# Altium PCB Sampler_DIOT.PCBDOC (part 6 of 9)
Units mm, origin at the board's own origin, x right, y up, seen from the top; angles counter-clockwise.
Board outline 222.17 x 100 mm, 4 copper layers (Top, GP1(GND), L3, Bot), stack 1.672 mm thick; 664 components, 411 nets, 2128 pads, 911 vias.
Unrouted connection lines stored in the file: 4.
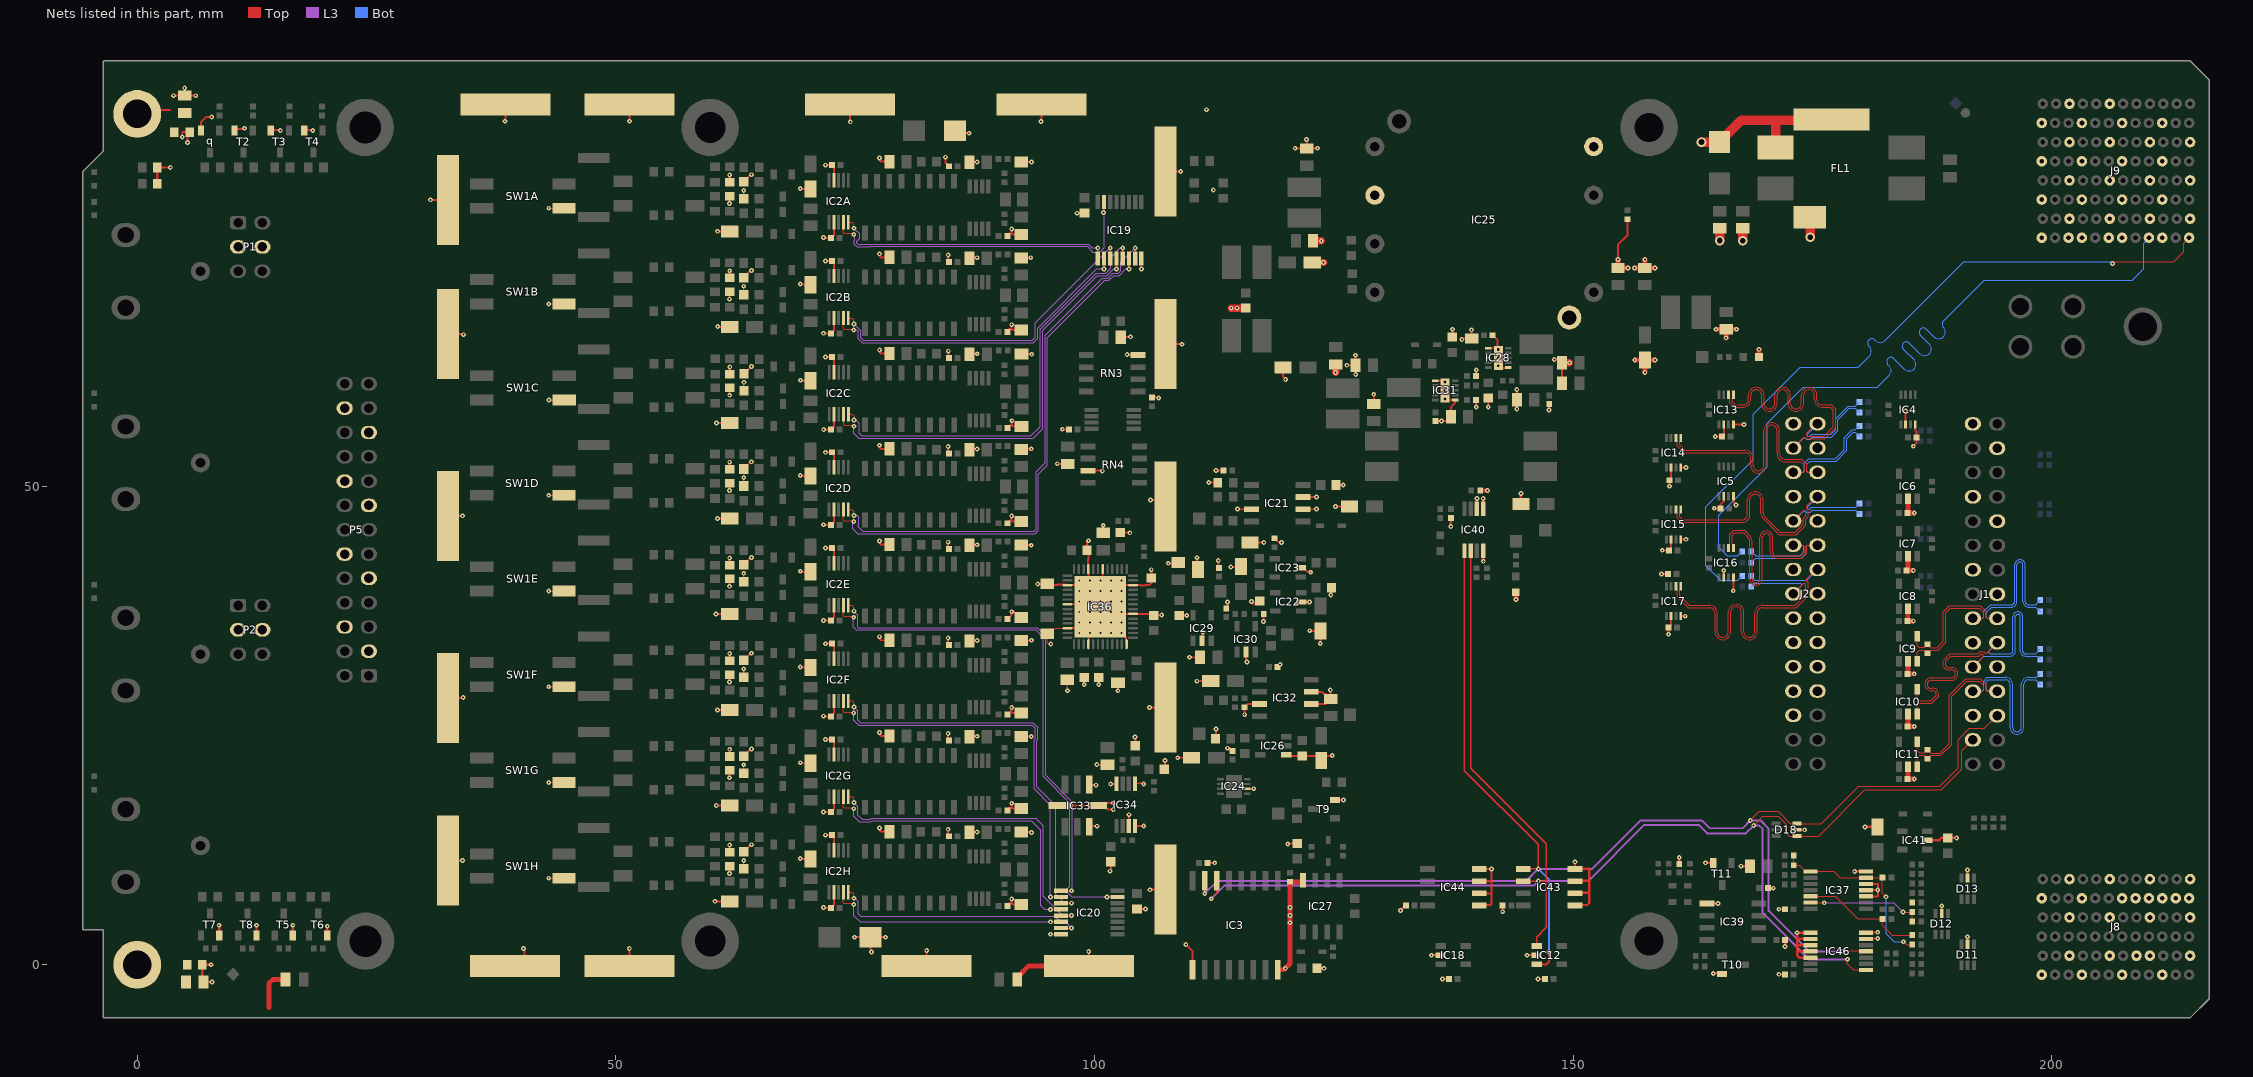
[diagram p6: the nets of this part, all layers, seen from the top]

## Via types
v1: diameter 0.5, hole 0.2, Top to Bot, tented both sides, 878 vias
v2: diameter 1, hole 0.6, Top to Bot, tented both sides, 18 vias
v3: diameter 0.6, hole 0.3, Top to Bot, tented both sides, 13 vias
v4: diameter 1.27, hole 0.711, Top to Bot, tented both sides, 2 vias

## Nets (pads, with @x,y where several pads share a name; then routed paths per layer and width w, separated by ;. In a path a pad name is that pad's centre, name@x,y a point inside that pad or via, vN(x,y) a via of type N, cw(c..) or ccw(c..) an arc to the next point about the centre after c; other vN are vias at no path point) (continued)
BP_IO.LVDS_P11: J9.D1 R133.1 | length 79.4
  Bot w0.127: R133.1@167.674,43.2 167.203,42.729 166.113,42.729 165.202,43.641 165.202,46.959 170.282,52.039 170.282,56.582 174.046,60.346 181.805,60.346 182.905,61.445 183.039,61.58 ccw(c182.545,62.074) 183.039,62.568 182.903,62.704 cw(c183.217,63.019) 182.903,63.333 cw(c183.217,63.019) 183.532,63.333 ; 183.532,63.332 184.621,62.243 ccw(c185.116,62.737) 185.61,62.243 ccw(c185.116,62.737) 185.647,63.19 185.647,63.193 184.519,64.321 cw(c184.834,64.635) 184.519,64.949 cw(c184.834,64.635) 185.148,64.949 ; 185.149,64.949 186.238,63.86 ccw(c186.732,64.353) 187.226,63.859 ccw(c186.732,64.353) 187.263,64.807 187.263,64.81 186.909,65.164 186.29,65.783 cw(c186.605,66.097) 186.29,66.411 cw(c186.605,66.097) 186.919,66.411 187.709,65.621 ccw(c188.203,66.115) 188.697,65.621 ccw(c188.203,66.115) 188.703,66.603 188.697,66.609 cw(c189.011,66.923) 188.697,67.238 192.96,71.501 193.155,71.501 208.411,71.501 209.606,72.696 209.606,75.387 J9.D1@210.169,75.95
BP_IO.LVDS_P12: J9.A1 R134.1 | length 77.8
  Top w0.127: v1(206.375,73.264) 206.568,73.457 212.771,73.457 213.792,74.478 213.792,75.373 J9.A1@214.369,75.95
  Bot w0.127: R134.1@167.674,40.6 167.231,40.157 165.41,40.157 163.875,41.693 163.875,47.838 168.808,52.771 168.808,57.533 173.721,62.446 179.805,62.446 180.823,63.463 180.957,63.598 ccw(c180.463,64.092) 180.957,64.586 180.899,64.644 cw(c181.213,64.959) 180.899,65.273 cw(c181.213,64.959) 181.528,65.273 181.586,65.215 ccw(c182.08,65.708) 182.574,65.215 190.155,72.795 190.816,73.457 206.182,73.457 v1(206.375,73.264)
BP_IO.LVDS_P13: J9.J1
BP_IO.LVDS_P14: J9.G1
BP_IO.LVDS_P15: J8.E2
BP_MGT_Rx_N: J8.E5
BP_MGT_Rx_P: J8.D5
BP_MGT_Tx_N: J8.B5
BP_MGT_Tx_P: J8.A5
CH0_A0: IC2A.4 IC19.15 | length 35.2
  Top w0.127: IC2A.4@73.775,77.567 73.775,76.458 73.825,76.408 74.754,76.408 v1(74.85,76.312) ; IC19.15@100.927,79.62 IC19.15@101.004,79.697 101.004,78.657 v1(100.944,78.597)
  L3 w0.127: v1(74.85,76.312) 74.934,76.397 74.934,75.73 74.919,75.715 74.919,75.302 75.211,75.01 76.573,75.01 76.608,75.045 99.229,75.045 99.844,74.43 100.377,74.43 100.405,74.459 100.536,74.459 101.004,74.926 101.004,78.657 v1(100.944,78.597)
CH0_A1: IC2A.5 IC19.1 | length 29.5
  Top w0.127: IC2A.5@74.275,77.567 74.688,77.567 74.875,77.379 v1(74.875,76.947) ; IC19.1@100.354,73.797 v1(100.354,74.899)
  L3 w0.127: v1(74.875,76.947) 75.469,76.354 75.469,75.905 75.173,75.609 75.173,75.407 75.316,75.264 76.468,75.264 76.503,75.299 99.334,75.299 99.734,74.899 v1(100.354,74.899)
CH1_A0: IC2B.4 IC19.2 | length 34.3
  Top w0.127: IC2B.4@73.775,67.567 73.775,66.458 73.825,66.408 74.754,66.408 v1(74.85,66.312) ; v1(101.004,72.695) IC19.2@101.004,73.797
  L3 w0.127: v1(74.85,66.312) 74.934,66.397 75.043,66.397 75.315,66.125 75.315,65.425 75.739,65.001 93.599,65.001 94.073,65.475 94.073,66.518 100.25,72.695 v1(101.004,72.695)
CH1_A1: IC2B.5 IC19.3 | length 35
  Top w0.127: IC2B.5@74.275,67.567 74.688,67.567 74.875,67.379 v1(74.875,66.947) ; IC19.3@101.654,73.797 v1(101.654,74.899)
  L3 w0.127: v1(74.875,66.947) 75.569,66.254 75.569,65.53 75.844,65.255 93.494,65.255 93.819,65.58 93.819,67.065 v1(101.654,74.899)
CH2_A0: IC2C.4 IC19.4 | length 45.3
  Top w0.127: IC2C.4@73.788,57.523 73.788,56.414 73.838,56.364 74.767,56.364 v1(74.863,56.269) ; v1(102.304,72.695) IC19.4@102.304,73.797
  L3 w0.127: v1@74.947,56.353 v1(74.863,56.269) 74.863,55.536 75.398,55.001 93.59,55.001 94.581,55.992 94.581,66.308 100.274,72.001 101.291,72.001 102.006,72.716 102.283,72.716 102.304,72.737 v1(102.304,72.695)
CH2_A1: IC2C.5 IC19.5 | length 46.3
  Top w0.127: IC2C.5@74.288,57.523 74.7,57.523 74.888,57.335 v1(74.888,56.904) ; IC19.5@102.954,73.797 v1(102.954,74.899)
  L3 w0.127: v1(74.888,56.904) 75.095,56.904 75.419,56.58 75.419,55.53 75.694,55.255 93.369,55.255 94.327,56.213 94.327,66.413 100.169,72.255 101.186,72.255 101.694,72.763 101.694,73.88 102.713,74.899 v1(102.954,74.899)
CH3_A0: IC2D.4 IC19.6 | length 56
  Top w0.127: IC2D.4@73.775,47.567 73.775,46.458 73.825,46.408 74.754,46.408 v1(74.85,46.312) ; v1(103.604,72.695) IC19.6@103.604,73.797
  L3 w0.127: v1@74.934,46.397 v1(74.85,46.312) 74.769,46.231 74.769,45.53 75.248,45.051 93.823,45.051 94.152,45.38 94.152,51.263 95.089,52.2 95.089,65.525 101.057,71.493 101.502,71.493 102.01,72.001 102.591,72.001 103.286,72.695 v1(103.604,72.695)
CH3_A1: IC2D.5 IC19.7 | length 57
  Top w0.127: IC2D.5@74.275,47.567 74.688,47.567 74.875,47.379 v1(74.875,46.947) ; IC19.7@104.254,73.797 v1(104.254,74.899)
  L3 w0.127: v1(74.875,46.947) 75.177,46.947 75.369,46.755 75.369,46.03 75.344,46.005 75.344,45.755 75.794,45.305 93.718,45.305 93.898,45.485 93.898,51.513 94.835,52.45 94.835,65.746 100.836,71.747 101.396,71.747 101.904,72.255 102.486,72.255 102.744,72.513 102.744,73.39 v1(104.254,74.899)
CH4_A0: IC2E.4 IC20.15 | length 57.1
  Top w0.127: IC2E.4@73.775,37.567 73.775,36.458 73.825,36.408 74.754,36.408 v1(74.85,36.312) ; v1(101.297,7.087) IC20.15@102.399,7.087
  L3 w0.127: v1@74.934,36.397 v1(74.85,36.312) 74.794,36.256 74.794,35.305 75.119,34.98 93.844,34.98 94.669,34.155 94.669,31.637 94.65,31.618 94.65,19.674 97.444,16.88 97.444,9.348 97.436,9.34 97.436,8.195 97.16,7.919 97.16,7.554 97.628,7.087 v1(101.297,7.087)
CH4_A1: IC2E.5 IC20.1 | length 51.9
  Top w0.127: IC2E.5@74.275,37.567 74.688,37.567 74.875,37.379 v1(74.875,36.947) ; IC20.1@96.499,7.737 v1(97.601,7.737)
  L3 w0.127: v1(74.875,36.947) 75.291,36.532 75.291,35.249 75.305,35.234 94.015,35.234 94.923,34.326 94.923,31.532 94.904,31.512 94.904,19.78 97.698,16.985 97.698,9.243 97.69,9.235 97.69,7.826 v1(97.601,7.737)
CH5_A0: IC2F.4 IC20.2 | length 42
  Top w0.127: IC2F.4@73.775,27.567 73.775,26.458 73.825,26.408 74.754,26.408 v1(74.85,26.312) ; v1(95.397,7.087) IC20.2@96.499,7.087
  L3 w0.127: v1@74.934,26.397 v1(74.85,26.312) 74.85,25.524 75.369,25.005 93.519,25.005 93.835,24.69 93.835,23.673 93.694,23.532 93.694,18.38 95.397,16.677 v1(95.397,7.087)
CH5_A1: IC2F.5 IC20.3 | length 43.3
  Top w0.127: IC2F.5@74.275,27.567 74.688,27.567 74.875,27.379 v1(74.875,26.947) ; IC20.3@96.499,6.437 v1(97.601,6.437)
  L3 w0.127: v1(74.875,26.947) 75.291,26.532 75.291,26.13 75.244,26.083 75.244,25.605 75.544,25.305 93.578,25.305 94.089,24.795 94.089,23.567 93.948,23.427 93.948,18.626 95.944,16.63 95.944,7.38 96.887,6.437 v1(97.601,6.437)
CH6_A0: IC2G.4 IC20.4 | length 33.6
  Top w0.127: IC2G.4@73.775,17.567 73.775,16.458 73.825,16.408 74.754,16.408 v1(74.85,16.312) ; v1(95.397,5.787) IC20.4@96.499,5.787
  L3 w0.127: v1@74.934,16.397 v1(74.85,16.312) 74.85,15.499 75.419,14.93 76.649,14.93 76.79,15.071 93.403,15.071 94.394,14.08 94.394,6.183 94.791,5.787 v1(95.397,5.787)
CH6_A1: IC2G.5 IC20.5 | length 34.8
  Top w0.127: IC2G.5@74.275,17.567 74.688,17.567 74.875,17.379 v1(74.875,16.947) ; IC20.5@96.499,5.137 v1(97.601,5.137)
  L3 w0.127: v1(74.875,16.947) 75.291,16.532 75.291,15.634 75.719,15.205 76.565,15.205 76.685,15.325 93.849,15.325 94.66,14.514 94.66,7.146 96.67,5.137 v1(97.601,5.137)
CH7_A0: IC2H.4 IC20.6 | length 25.4
  Top w0.127: IC2H.4@73.775,7.567 73.775,6.458 73.825,6.408 74.754,6.408 v1(74.85,6.312) ; v1(95.397,4.487) IC20.6@96.499,4.487
  L3 w0.127: v1@74.934,6.397 v1(74.85,6.312) 74.85,5.149 75.512,4.487 v1(95.397,4.487)
CH7_A1: IC2H.5 IC20.7 | length 27
  Top w0.127: IC2H.5@74.275,7.567 74.688,7.567 74.875,7.379 v1(74.875,6.947) ; IC20.7@96.499,3.837 v1(97.601,3.837)
  L3 w0.127: v1(74.875,6.947) 74.952,6.947 75.319,6.58 75.319,5.33 75.574,5.075 95.862,5.075 96.557,4.38 97.057,4.38 v1(97.601,3.837)
CHASSIS1: C36.1 M4.1 R47.2 R49.1 | length 4.5
  Top w0.152: C36.1@5.1,-1.8 C36.1@5.2,-1.7
  Top w0.508: 13.75,-4.462 13.75,-1.95 14.15,-1.55 R49.1@15.48,-1.55
CHASSIS2: C34.1 M3.1 R46.2 | length 3.4
  Top w0.203: M3.1@0,89.292 3.407,89.292
EEM0_I2C.SCL: D18.1 IC3.14 IC12.1 IC40.2 IC43.6 IC46.1 J1.27 | length 163.5
  Top w0.127: v1(112.2,6.9) 112.789,7.489 IC3.14@112.789,8.78 ; v1(168.875,14.55) 169.845,15.52 171.455,15.52 172.3,14.675 172.3,13.75 172.6,13.45 D18.1@173.4,13.45 175.654,13.45 180.479,18.275 188.45,18.275 190.625,20.45 190.625,22.343 J1.27@191.772,23.49 ; v1(178.675,0.575) 178.675,0.103 179.285,-0.508 IC46.1@180.631,-0.508
  Top w0.152: IC40.2@139.305,43.25 139.305,20.556 147.201,12.66 147.201,8.75 ; IC43.6@144.8,8.735 144.815,8.75 v1(146.371,8.75) 147.201,8.75 ; IC12.1@146.2,1.95 146.2,2.9 147.201,3.901 147.201,8.75
  L3 w0.203: v1(112.2,6.9) 113.606,8.306 145.927,8.306 v1(146.371,8.75) 151.575,8.75 157.441,14.616 163.116,14.616 164.007,13.725 168.05,13.725 v1(168.875,14.55) 169.445,14.55 169.796,14.199 169.796,5.431 174.653,0.575 v1(178.675,0.575)
EEM0_I2C.SDA: D18.3 IC3.15 IC12.3 IC40.1 IC43.5 IC46.4 J1.26 | length 167.5
  Top w0.127: v1(111.519,7.45) IC3.15@111.519,8.78 ; v1(168.525,15.075) 169.475,16.025 171.425,16.025 172.7,14.75 D18.3@173.4,14.75 175.938,14.75 179.838,18.65 188.3,18.65 190.225,20.575 190.225,23.525 191.4,24.7 192.982,24.7 J1.26@194.312,26.03 ; v1(178.159,1.4) 178.201,1.442 IC46.4@180.631,1.442
  Top w0.152: IC40.1@138.655,43.25 138.655,20.293 146.371,12.577 v1@146.371,10.055 ; IC43.5@145.03,10.055 v1@146.185,10.055 ; v1@146.22,10.02 v1@146.185,10.055 ; v1(146.371,10.02) v1@146.371,10.055 ; v1@146.185,10.055 v1@146.371,10.055
  Top w0.203: IC12.3@146.2,0.05 147.225,0.05 147.5,0.325 v1(147.5,1.35)
  L3 w0.203: v1(111.519,7.45) 112.804,8.735 145.086,8.735 v1(146.371,10.02) 151.995,10.02 157.055,15.08 163.47,15.08 164.288,14.262 167.712,14.262 v1(168.525,15.075) 169.597,15.075 170.444,14.228 170.444,5.636 174.68,1.4 v1(178.159,1.4)
  Bot w0.203: v1(146.371,10.02) 147.5,8.891 v1(147.5,1.35)
EEM_IO.LVDS_N5: IC9.4 J1.18 R18.1 R143.2 | length 30.7
  Top w0.127: IC9.4@185.95,34.3 185.95,33.324 186.122,33.152 186.732,33.152 R18.1@187.05,33.47 187.391,33.129 188.045,33.129 188.696,33.78 188.696,36.896 189.325,37.525 192.559,37.525 193.154,36.93 193.154,36.321 193.285,36.19 J1.18@194.312,36.19
  Bot w0.127: J1.18@194.312,36.19 193.319,36.19 193.185,36.325 193.185,36.821 193.739,37.375 193.863,37.375 195.815,37.375 ccw(c195.815,37.942) 196.383,37.942 196.383,41.778 cw(c196.696,41.778) 196.696,42.092 cw(c196.696,41.778) 197.01,41.778 197.01,37.942 ccw(c197.577,37.942) 197.577,37.375 198.31,37.375 198.355,37.375 R143.2@198.83,36.9
EEM_IO.LVDS_N6: IC10.3 J1.21 R144.2 | length 33.2
  Top w0.127: IC10.3@185.95,26.2 185.95,27.148 186.148,27.346 187.496,27.346 187.642,27.492 188.2,28.05 188.2,28.223 ccw(c187.533,28.223) 187.533,28.89 187.413,28.89 cw(c187.413,29.304) 186.999,29.304 cw(c187.413,29.304) 187.413,29.717 189.54,29.717 ccw(c189.54,30.385) 190.208,30.385 ccw(c189.54,30.385) 189.54,31.052 189.285,31.052 cw(c189.285,31.466) 188.993,31.758 189.455,32.221 190.397,32.221 192.389,32.221 192.589,32.421 192.75,32.421 192.864,32.307 192.864,32.202 J1.21@191.772,31.11
  Bot w0.127: J1.21@191.772,31.11 192.918,32.256 193.935,32.256 195.688,32.256 ccw(c195.688,32.774) 196.205,32.774 196.205,36.351 cw(c196.469,36.351) 196.469,36.614 cw(c196.469,36.351) 196.732,36.351 196.732,32.774 ccw(c197.25,32.774) 197.25,32.256 198.312,32.256 198.474,32.256 R144.2@198.83,31.9
EEM_IO.LVDS_N7: IC11.4 J1.24 R19.1 R145.2 | length 35
  Top w0.127: IC11.4@185.95,23.3 185.95,22.377 186.194,22.134 186.714,22.134 R19.1@187.05,22.47 187.395,22.125 188.318,22.125 189.296,23.103 189.296,28.155 191.016,29.875 192.55,29.875 193.154,29.271 193.154,28.701 193.285,28.57 J1.24@194.312,28.57
  Bot w0.127: J1.24@194.312,28.57 193.388,28.57 193.195,28.763 193.195,29.586 193.38,29.771 193.827,29.771 195.198,29.771 cw(c195.198,29.308) 195.662,29.308 195.662,24.806 ccw(c196.379,24.806) 196.379,24.089 ccw(c196.379,24.806) 197.097,24.806 197.097,29.308 cw(c197.56,29.308) 197.56,29.771 198.351,29.771 198.359,29.771 R145.2@198.83,29.3
EEM_IO.LVDS_N8: IC13.5 J2.3 R146.2 | length 37.9
  Top w0.127: IC13.5@166.75,59.55 166.75,59.275 166.627,59.152 166.627,58.829 166.953,58.503 167.564,58.503 167.755,58.503 ccw(c167.755,59.067) 168.318,59.067 168.318,59.499 cw(c169.136,59.499) 169.136,60.317 cw(c169.136,59.499) 169.953,59.499 169.953,58.647 ccw(c170.517,58.647) 170.517,58.084 ccw(c170.517,58.647) 171.08,58.647 171.08,59.499 cw(c171.898,59.499) 171.898,60.317 cw(c171.898,59.499) 172.715,59.499 172.715,58.647 ccw(c173.279,58.647) 173.279,58.084 ccw(c173.279,58.647) 173.842,58.647 173.842,59.499 cw(c174.66,59.499) 174.66,60.317 cw(c174.66,59.499) 175.477,59.499 175.477,59.067 ccw(c176.041,59.067) 176.041,58.503 176.978,58.503 177.168,58.314 177.422,58.06 177.422,56.109 176.287,54.975 174.383,54.975 174.235,55.123 174.129,55.123 J2.3@173.002,53.996
  Bot w0.127: J2.3@173.002,53.996 174.081,55.075 174.25,55.075 174.4,54.925 174.8,54.925 174.993,55.118 176.977,55.118 177.676,55.817 177.676,56.967 178.834,58.125 179.505,58.125 R146.2@179.93,57.7
EEM_IO.LVDS_N9: IC14.5 J2.6 R147.2 | length 35.3
  Top w0.127: IC14.5@161.25,55.05 161.25,54.775 161.127,54.652 161.127,54.311 161.687,53.75 166.417,53.75 167.989,53.75 cw(c167.989,52.933) 168.806,52.933 168.806,52.186 ccw(c169.37,52.186) 169.37,51.622 ccw(c169.37,52.186) 169.933,52.186 169.933,55.819 cw(c170.751,55.819) 170.751,56.637 cw(c170.751,55.819) 171.568,55.819 171.568,53.389 ccw(c172.132,53.389) 172.132,52.825 173.125,52.825 173.9,52.825 174.399,52.326 174.399,51.53 174.473,51.456 J2.6@175.542,51.456
  Bot w0.127: J2.6@175.542,51.456 174.549,51.456 174.425,51.58 174.425,52.275 174.771,52.621 177.499,52.621 178.515,53.637 178.59,53.712 178.59,54.94 179.271,55.621 179.509,55.621 R147.2@179.93,55.2
EEM_IO.LVDS_N10: IC15.5 J2.9 R148.2 | length 30.4
  Top w0.127: IC15.5@161.25,47.55 161.25,47.275 161.127,47.152 161.127,46.828 161.48,46.475 167.473,46.475 167.663,46.475 ccw(c167.663,47.039) 168.227,47.039 168.227,48.594 cw(c169.044,48.594) 169.044,49.412 cw(c169.044,48.594) 169.862,48.594 169.862,47.207 ccw(c170.425,47.207) 170.027,46.808 171.663,45.172 171.689,45.172 173.207,45.172 174.042,46.007 174.042,46.645 174.309,46.912 174.309,47.429 174.235,47.503 174.129,47.503 J2.9@173.002,46.376
  Bot w0.127: J2.9@173.002,46.376 174.081,47.455 174.25,47.455 174.4,47.305 174.8,47.305 174.993,47.498 179.532,47.498 R148.2@179.93,47.1
EEM_IO.LVDS_N11: IC16.5 J2.12 R149.2 | length 31.4
  Top w0.127: IC16.5@166.75,43.55 166.75,43.825 166.627,43.948 166.627,44.863 166.762,44.998 166.889,45.125 167.815,45.125 168.326,44.615 cw(c168.034,44.323) 168.447,44.323 168.447,40.316 ccw(c169.114,40.316) 169.114,39.649 ccw(c169.115,40.316) 169.782,40.316 169.782,44.661 cw(c170.195,44.661) 170.195,45.074 cw(c170.195,44.661) 170.609,44.661 170.609,43.143 ccw(c171.276,43.143) 171.276,42.476 172.631,42.476 173.892,42.476 174.399,42.983 174.399,43.761 174.473,43.836 J2.12@175.542,43.836
  Bot w0.127: R149.2@168.614,42 169.085,42.471 170.076,42.471 ; 170.076,42.47 173.845,42.47 174.383,43.008 174.383,43.705 174.514,43.836 J2.12@175.542,43.836
EEM_IO.LVDS_N12: IC17.5 J2.15 R150.2 | length 36.1
  Top w0.127: IC17.5@161.25,39.55 161.25,39.275 161.127,39.152 161.127,38.567 162.141,37.554 162.7,37.554 164.271,37.554 cw(c164.271,36.737) 165.089,36.737 165.089,34.784 ccw(c165.652,34.784) 165.652,34.22 ccw(c165.652,34.784) 166.216,34.784 166.216,36.827 cw(c167.033,36.827) 167.033,37.644 cw(c167.033,36.827) 167.851,36.827 167.851,34.784 ccw(c168.414,34.784) 168.414,34.22 ccw(c168.414,34.784) 168.978,34.784 168.978,36.737 cw(c169.795,36.737) 169.795,37.554 171.888,37.554 173.209,37.554 174.042,38.387 174.042,39.025 174.309,39.292 174.309,39.809 174.235,39.883 174.129,39.883 J2.15@173.002,38.756
  Bot w0.127: R150.2@168.614,39.452 169.041,39.879 169.047,39.873 173.815,39.873 173.904,39.784 173.904,39.658 J2.15@173.002,38.756
EEM_IO.LVDS_N13: J2.18
EEM_IO.LVDS_N14: J2.21
EEM_IO.LVDS_N15: J2.24
EEM_IO.LVDS_P5: IC9.3 J1.17 R18.2 R127.2 | length 30.6
  Top w0.127: IC9.3@185.95,31.7 185.95,32.644 186.154,32.848 186.732,32.848 R18.2@187.05,32.53 187.395,32.875 188.15,32.875 188.95,33.675 188.95,36.791 189.43,37.271 192.454,37.271 192.9,36.825 192.9,36.325 192.765,36.19 J1.17@191.772,36.19
  Bot w0.127: J1.17@191.772,36.19 192.8,36.19 192.931,36.321 192.931,36.926 193.633,37.629 193.863,37.629 195.815,37.629 ccw(c195.815,37.942) 196.129,37.942 196.129,41.778 cw(c196.696,41.778) 196.696,42.346 cw(c196.696,41.778) 197.264,41.778 197.264,37.942 ccw(c197.577,37.942) 197.577,37.629 198.31,37.629 198.359,37.629 R127.2@198.83,38.1
EEM_IO.LVDS_P6: IC10.4 J1.20 R128.2 | length 32.9
  Top w0.127: IC10.4@185.95,28.8 185.95,27.852 186.202,27.6 186.682,27.6 187.391,27.6 187.946,28.155 187.946,28.223 ccw(c187.533,28.223) 187.533,28.636 187.413,28.636 cw(c187.413,29.304) 186.745,29.304 cw(c187.413,29.304) 187.413,29.971 189.54,29.971 ccw(c189.54,30.385) 189.954,30.385 ccw(c189.54,30.385) 189.54,30.798 189.285,30.798 cw(c189.285,31.466) 188.813,31.938 189.144,32.269 189.35,32.475 192.268,32.475 192.514,32.721 192.914,32.721 193.064,32.571 193.233,32.571 J1.20@194.312,33.65
  Bot w0.127: J1.20@194.312,33.65 193.391,32.729 193.611,32.51 193.935,32.51 195.688,32.51 ccw(c195.688,32.774) 195.951,32.774 195.951,36.351 cw(c196.469,36.351) 196.469,36.868 cw(c196.469,36.351) 196.986,36.351 196.986,32.774 ccw(c197.25,32.774) 197.25,32.51 198.312,32.51 198.34,32.51 R128.2@198.83,33
EEM_IO.LVDS_P7: IC11.3 J1.23 R19.2 R129.2 | length 34.9
  Top w0.127: IC11.3@185.95,20.7 185.95,21.623 186.207,21.88 186.7,21.88 R19.2@187.05,21.53 187.391,21.871 188.424,21.871 189.55,22.997 189.55,28.05 191.121,29.621 192.445,29.621 192.9,29.166 192.9,28.705 192.765,28.57 192.3,28.57 J1.23@191.772,28.57
  Bot w0.127: J1.23@191.772,28.57 192.697,28.57 192.89,28.763 192.89,29.64 193.275,30.025 193.827,30.025 195.198,30.025 cw(c195.198,29.308) 195.916,29.308 195.916,24.806 ccw(c196.379,24.806) 196.379,24.343 ccw(c196.379,24.806) 196.843,24.806 196.843,29.308 cw(c197.56,29.308) 197.56,30.025 198.351,30.025 198.455,30.025 R129.2@198.83,30.4
EEM_IO.LVDS_P8: IC13.6 J2.2 R130.2 | length 37
  Top w0.127: IC13.6@166.25,59.55 166.25,59.275 166.373,59.152 166.373,58.723 166.847,58.249 167.564,58.249 167.755,58.249 ccw(c167.755,59.067) 168.572,59.067 168.572,59.499 cw(c169.136,59.499) 169.136,60.063 cw(c169.136,59.499) 169.699,59.499 169.699,58.647 ccw(c170.517,58.647) 170.517,57.83 ccw(c170.517,58.647) 171.334,58.647 171.334,59.499 cw(c171.898,59.499) 171.898,60.063 cw(c171.898,59.499) 172.461,59.499 172.461,58.647 ccw(c173.279,58.647) 173.279,57.83 ccw(c173.279,58.647) 174.096,58.647 174.096,59.499 cw(c174.66,59.499) 174.66,60.063 cw(c174.66,59.499) 175.223,59.499 175.223,59.067 ccw(c176.041,59.067) 176.041,58.249 176.873,58.249 177.168,57.954 177.168,57.766 177.168,56.214 176.182,55.229 174.489,55.229 174.414,55.303 174.414,55.558 175.392,56.536 J2.2@175.542,56.536
  Bot w0.127: J2.2@175.542,56.536 174.45,55.444 174.45,55.339 174.564,55.225 174.725,55.225 174.923,55.423 176.923,55.423 177.422,55.922 177.422,57.072 178.729,58.379 179.509,58.379 R130.2@179.93,58.8
EEM_IO.LVDS_P9: IC14.6 J2.5 R131.2 | length 35.8
  Top w0.127: IC14.6@160.75,55.05 160.75,54.775 160.873,54.652 160.873,54.205 161.582,53.496 166.417,53.496 167.989,53.496 cw(c167.989,52.933) 168.552,52.933 168.552,52.186 ccw(c169.37,52.186) 169.37,51.368 ccw(c169.37,52.186) 170.187,52.186 170.187,55.819 cw(c170.751,55.819) 170.751,56.383 cw(c170.751,55.819) 171.314,55.819 171.314,53.389 ccw(c172.132,53.389) 172.132,52.571 173.125,52.571 173.794,52.571 174.145,52.221 174.145,51.53 174.07,51.456 J2.5@173.002,51.456
  Bot w0.127: J2.5@173.002,51.456 174.03,51.456 174.171,51.597 174.171,52.396 174.65,52.875 177.394,52.875 178.336,53.817 178.336,55.045 179.166,55.875 179.505,55.875 R131.2@179.93,56.3
EEM_IO.LVDS_P10: IC15.6 J2.8 R132.2 | length 31.2
  Top w0.127: IC15.6@160.75,47.55 160.75,47.275 160.873,47.152 160.873,46.723 161.375,46.221 167.473,46.221 167.663,46.221 ccw(c167.663,47.039) 168.481,47.039 168.481,48.594 cw(c169.044,48.594) 169.044,49.158 cw(c169.044,48.594) 169.608,48.594 169.608,47.207 ccw(c170.425,47.207) 169.847,46.629 171.558,44.918 171.689,44.918 173.312,44.918 174.296,45.902 174.296,46.54 174.563,46.806 174.563,47.534 174.414,47.683 174.414,47.938 175.392,48.916 J2.8@175.542,48.916
  Bot w0.127: 174.918,47.798 174.725,47.605 174.564,47.605 174.45,47.719 174.45,47.824 J2.8@175.542,48.916 ; 174.918,47.802 179.532,47.802 R132.2@179.93,48.2
EEM_IO.LVDS_P11: IC16.6 J2.11 R133.2 | length 31
  Top w0.127: IC16.6@166.25,43.55 166.25,43.825 166.373,43.948 166.373,44.969 166.762,45.357 166.784,45.379 167.921,45.379 168.505,44.795 cw(c168.034,44.323) 168.701,44.323 168.701,40.316 ccw(c169.114,40.316) 169.114,39.903 ccw(c169.115,40.316) 169.528,40.316 169.528,44.661 cw(c170.195,44.661) 170.195,45.328 cw(c170.195,44.661) 170.863,44.661 170.863,43.143 ccw(c171.276,43.143) 171.276,42.73 172.631,42.73 173.787,42.73 174.145,43.088 174.145,43.761 174.07,43.836 J2.11@173.002,43.836
  Bot w0.127: R133.2@168.614,43.2 169.089,42.725 173.741,42.725 174.129,43.114 174.129,43.701 173.995,43.836 J2.11@173.002,43.836
EEM_IO.LVDS_P12: IC17.6 J2.14 R134.2 | length 37.9
  Top w0.127: IC17.6@160.75,39.55 160.75,39.275 160.873,39.152 160.873,38.462 162.036,37.3 162.7,37.3 164.271,37.3 cw(c164.271,36.737) 164.835,36.737 164.835,34.784 ccw(c165.652,34.784) 165.652,33.966 ccw(c165.652,34.784) 166.47,34.784 166.47,36.827 cw(c167.033,36.827) 167.033,37.39 cw(c167.033,36.827) 167.597,36.827 167.597,34.784 ccw(c168.414,34.784) 168.414,33.966 ccw(c168.414,34.784) 169.232,34.784 169.232,36.737 cw(c169.795,36.737) 169.795,37.3 171.888,37.3 173.315,37.3 174.296,38.282 174.296,38.92 174.563,39.186 174.563,39.914 174.414,40.063 174.414,40.318 175.392,41.296 J2.14@175.542,41.296
  Bot w0.127: R134.2@168.614,40.552 168.981,40.184 174.43,40.184 J2.14@175.542,41.296
EEM_IO.LVDS_P13: J2.17
EEM_IO.LVDS_P14: J2.20
EEM_IO.LVDS_P15: J2.23
GA0: IC37.6 IC37.8 R90.1 R108.1 R109.2 R112.1 | length 20
  Top w0.127: R112.1@173.07,11.4 R108.1@173.07,10.4 173.65,10.4 174.3,9.75 IC37.8@174.8,9.75 177.261,9.75 177.911,9.1 IC37.6@180.6,9.1 R109.2@182.33,9.1 182.33,7.47 v1(182.7,7.1) ; v1(184.534,2.41) 184.844,2.1 R90.1@185.43,2.1
  Bot w0.127: v1(182.7,7.1) 182.7,3.25 183.54,2.41 v1(184.534,2.41)
GA1: IC37.12 R91.1 R107.2 | length 12.7
  Top w0.127: IC37.12@174.8,7.15 177.375,7.15 179.725,4.8 R107.2@182.33,4.8 182.33,4.134 183.364,3.1 R91.1@185.43,3.1
GA2: IC37.13 R94.1 R104.2 | length 11.8
  Top w0.127: IC37.13@175.001,6.475 v1(176.245,6.475) ; v1(184.475,5.5) R94.1@185.43,5.5 R104.2@185.43,4.5
  L3 w0.127: v1(176.245,6.475) 183.5,6.475 v1(184.475,5.5)
GA3: R99.1
GND: C1A.1 C1B.1 C1C.1 C1D.1 C1E.1 C1F.1 C1G.1 C1H.1 C3A.1 C3B.1 C3C.1 C3D.1 C3E.1 C3F.1 C3G.1 C3H.1 C4A.1 C4B.1 C4C.1 C4D.1 C4E.1 C4F.1 C4G.1 C4H.1 C5A.1 C5B.1 C5C.1 C5D.1 C5E.1 C5F.1 C5G.1 C5H.1 C7A.2 C7B.2 C7C.2 C7D.2 C7E.2 C7F.2 C7G.2 C7H.2 C8A.2 C8B.2 C8C.2 C8D.2 C8E.2 C8F.2 C8G.2 C8H.2 C9A.1 C9B.1 C9C.1 C9D.1 C9E.1 C9F.1 C9G.1 C9H.1 C10A.1 C10B.1 C10C.1 C10D.1 C10E.1 C10F.1 C10G.1 C10H.1 C11A.1 C11B.1 C11C.1 C11D.1 C11E.1 C11F.1 C11G.1 C11H.1 C12A.1 C12B.1 C12C.1 C12D.1 C12E.1 C12F.1 C12G.1 C12H.1 C13A.1 C13B.1 C13C.1 C13D.1 C13E.1 C13F.1 C13G.1 C13H.1 C14A.1 C14B.1 C14C.1 C14D.1 C14E.1 C14F.1 C14G.1 C14H.1 C15.1 C16.1 C17.1 C18.1 C19.1 C20.1 C21.1 C22.1 C23.1 C24.1 C25.1 C27.1 C28.1 C30.1 C32.1 C33.1 C34.2 C36.2 C37.1 C38.2 C39.1 C41.1 C43.1 C44.2 C45.1 C47.2 C48.1 C49.1 C50.2 C51.1 C52.2 C53.1 C54.1 C55.1 C56.1 C57.1 C58.1 C59.1 C60.1 C61.1 C62.1 C63.1 C64.1 C65.1 C66.1 C67.2 C68.1 C69.1 C70.1 C71.1 C72.1 C73.1 C74.1 C76.1 C77.2 C78.1 C79.1 C80.2 C81.1 C83.1 C84.2 C85.1 C86.1 C87.1 C88.1 C89.1 C90.1 C91.1 C92.1 C93.1 C94.1 C95.1 C96.1 C97.1 C98.1 C99.1 C100.1 C101.1 C102.1 C103.1 C104.1 C105.1 C106.1 C108.1 C109.1 C110.1 C111.1 C112.1 C113.1 C114.1 C115.1 C117.1 C118.2 C119.1 C120.1 C121.1 C122.1 C123.1 CLIP1.1 CLIP2.1 CLIP3.1 CLIP4.1 CLIP5.1 CLIP6.1 CLIP7.1 CLIP8.1 CLIP9.1 CLIP10.1 CLIP11.1 CLIP12.1 CLIP13.1 CLIP14.1 CLIP15.1 CLIP16.1 CLIP17.1 CLIP18.1 D5.2 D6.1 D11.2 D12.2 D13.2 D16.2 D18.2 FL1.4 IC2A.2 IC2A.9 IC2B.2 IC2B.9 IC2C.2 IC2C.9 IC2D.2 IC2D.9 IC2E.2 IC2E.9 IC2F.2 IC2F.9 IC2G.2 IC2G.9 IC2H.2 IC2H.9 IC3.1 IC3.8 IC4.2 IC4.4 IC5.2 IC5.4 IC6.2 IC7.2 IC8.2 IC9.2 IC10.2 IC11.2 IC12.2 IC13.2 IC13.4 IC14.2 IC14.4 IC15.2 IC15.4 IC16.2 IC16.4 IC17.2 IC17.4 IC18.2 IC19.8 IC20.8 IC21.3 IC21.6 IC21.7 IC22.2 IC23.2 IC24.6 IC25.3 IC25.5 IC25.8 IC26.1 IC27.4 IC28.1 IC28.6 IC28.11 IC29.2 IC30.2 IC31.1 IC31.6 IC31.11 IC32.3 IC32.6 IC32.7 IC33.3 IC33.4 IC33.5 IC33.8 IC34.3 IC34.4 IC34.5 IC34.8 IC36.3 IC36.7 IC36.12 IC36.18 IC36.26 IC36.32 IC36.38 IC36.46 IC36.49 IC36.53 IC37.3 IC37.4 IC37.5 IC37.7 IC39.1 IC40.4 IC40.5 IC40.6 IC41.2 IC43.1 IC43.2 IC43.3 IC43.4 IC44.1 IC44.2 IC44.3 IC44.4 IC46.6 IC46.7 IC46.8 IC46.9 IC46.10 IC46.11 IC46.12 J1.1 J1.4 J1.7 J1.10 J1.13 J1.16 J1.19 J1.22 J1.25 J2.1 J2.4 J2.7 J2.10 J2.13 J2.16 J2.19 J2.22 J2.25 J8.A2 J8.A4 J8.A6 J8.C1 J8.C5 J8.D2 J8.D4 J8.D6 J8.F1 J8.F5 J8.G2 J8.G4 J8.G6 J8.I1 J8.I5 J8.J2 J8.J4 J8.J6 J8.L1 J8.L5 J9.A2 J9.A4 J9.A6 J9.C1 J9.C3 J9.C5 J9.C7 J9.D2 J9.D4 J9.D6 J9.F1 J9.F3 J9.F5 J9.F7 J9.G2 J9.G4 J9.G6 J9.G8 J9.I1 J9.I3 J9.I5 J9.I7 J9.J2 J9.J4 J9.J6 J9.J8 J9.L1 J9.L3 J9.L5 J9.L7 LD7.1 LD8.1 P1.3 P1.4 P2.3 P2.4 P5.3 P5.6 P5.9 P5.12 P5.15 P5.18 P5.21 P5.24 q.2 R4A.1 R4B.1 R4C.1 R4D.1 R4E.1 R4F.1 R4G.1 R4H.1 R11A.1 R11B.1 R11C.1 R11D.1 R11E.1 R11F.1 R11G.1 R11H.1 R35.2 R38.2 R46.1 R47.1 R50.1 R52.1 R55.1 R57.1 R62.1 R63.1 R68.1 R71.1 R74.1 R75.1 R117.1 RN3.4 RN4.7 SW1A.3 SW1B.3 SW1C.3 SW1D.3 SW1E.3 SW1F.3 SW1G.3 SW1H.3 T2.2 T3.2 T4.2 T5.2 T6.2 T7.2 T8.2 T9.2 T10.2 T11.2 | length 532.6
  Top w0.127: v1(42.989,9.05) SW1H.3@44.586,9.05 ; v1(42.989,19.05) SW1G.3@44.586,19.05 ; v1(42.989,29.05) SW1F.3@44.586,29.05 ; v1(42.989,39.05) SW1E.3@44.586,39.05 ; v1(42.989,49.05) SW1D.3@44.586,49.05 ; v1(42.989,69.05) SW1B.3@44.586,69.05 ; v1(42.989,79.05) SW1A.3@44.586,79.05 ; v1(43.002,59.006) SW1C.3@44.599,59.006 ; C5H.1@63.362,10.02 v1(63.362,10.897) ; C5G.1@63.362,20.02 v1(63.362,20.897) ; C5F.1@63.362,30.02 v1(63.362,30.897) ; C5E.1@63.362,40.02 v1(63.362,40.897) ; C5D.1@63.362,50.02 v1(63.362,50.897) ; C5B.1@63.362,70.02 v1(63.362,70.897) ; C5A.1@63.362,80.02 v1(63.362,80.897) ; C5C.1@63.375,59.976 v1(63.375,60.853) ; v1(95.397,3.187) IC20.8@96.499,3.187 ; v1(95.444,33.505) 95.219,33.505 95.069,33.655 C96.1@95.069,34.566 95.28,34.566 95.896,35.182 96.501,35.182 96.522,35.161 97.185,35.161 IC36.12@97.189,35.165 ; v1(104.904,72.695) IC19.8@104.904,73.797
  Top w0.203: v1(3.795,90.805) C34.2@4.953,90.805 ; v1(4.696,86.488) 4.696,86.982 4.716,87.002 R46.1@5.469,87.002 5.244,86.778 v1(5.244,85.909) ; v1(4.95,91.6) 4.953,91.597 C34.2@4.953,90.805 ; v1(6.095,90.805) C34.2@4.953,90.805 ; q.2@6.65,87.15 6.65,88.05 7.18,88.58 v1(7.771,88.58) ; T2.2@10.244,87.3 11.094,87.3 v1(11.194,87.4) ; T3.2@13.994,87.2 14.894,87.2 v1(14.944,87.15) ; T4.2@17.48,87.2 18.3,87.2 v1(18.33,87.17) ; v1(30.629,79.919) 30.668,79.88 CLIP1.1@32.444,79.88 ; CLIP2.1@32.444,10.88 33.944,10.88 v1(33.969,10.905) ; CLIP5.1@32.444,27.88 34.019,27.88 34.044,27.905 v1(34.044,27.93) ; CLIP6.1@32.444,46.88 33.969,46.88 33.994,46.905 v1(33.969,46.905) ; CLIP7.1@32.444,65.88 34.019,65.88 v1(34.069,65.83) ; v1(38.419,88.13) 38.419,88.169 38.344,88.244 38.444,88.344 CLIP18.1@38.444,89.88 ; v1(40.357,1.687) 40.444,1.6 CLIP13.1@40.444,-0.12 ; v1(51.406,1.687) 51.444,1.649 CLIP17.1@51.444,-0.12 ; v1(51.419,88.13) 51.419,88.169 51.344,88.244 51.444,88.344 CLIP8.1@51.444,89.88 ; v1(60.344,6.63) C11H.1@61.894,6.63 ; v1(60.469,36.655) 60.494,36.63 C11E.1@61.894,36.63 ; v1(60.494,16.63) C11G.1@61.894,16.63 ; v1(60.519,56.605) 60.538,56.586 C11C.1@61.907,56.586 ; v1(60.619,26.605) 60.644,26.63 C11F.1@61.894,26.63 ; v1(60.619,46.63) C11D.1@61.894,46.63 ; v1(60.619,76.63) C11A.1@61.894,76.63 ; v1(60.644,66.68) 60.694,66.63 C11B.1@61.894,66.63 ; v1(61.876,9.54) R11H.1@61.876,10.312 ; R4H.1@61.876,11.76 v1@61.876,12.52 ; v1(61.876,19.54) R11G.1@61.876,20.312 ; R4G.1@61.876,21.76 v1@61.876,22.52 ; v1(61.876,29.54) R11F.1@61.876,30.312 ; R4F.1@61.876,31.76 v1@61.876,32.52 ; v1(61.876,39.54) R11E.1@61.876,40.312 ; R4E.1@61.876,41.76 v1@61.876,42.52 ; v1(61.876,49.54) R11D.1@61.876,50.312 ; R4D.1@61.876,51.76 v1@61.876,52.52 ; v1(61.876,69.54) R11B.1@61.876,70.312 ; R4B.1@61.876,71.76 v1@61.876,72.52 ; v1(61.876,79.54) R11A.1@61.876,80.312 ; R4A.1@61.876,81.76 v1@61.876,82.52 ; v1(61.889,59.496) R11C.1@61.889,60.268 ; R4C.1@61.889,61.716 v1@61.889,62.476 ; C1H.1@63.362,11.798 v1@64.112,12.548 ; C1G.1@63.362,21.798 v1@64.112,22.548 ; C1F.1@63.362,31.798 v1@64.112,32.548 ; C1E.1@63.362,41.798 v1@64.112,42.548 ; C1D.1@63.362,51.798 v1@64.112,52.548 ; C1B.1@63.362,71.798 v1@64.112,72.548 ; C1A.1@63.362,81.798 v1@64.112,82.548 ; C1C.1@63.375,61.754 v1@64.125,62.504 ; v1(69.262,11.113) 69.317,11.058 C8H.2@70.329,11.058 ; v1(69.262,21.113) 69.317,21.058 C8G.2@70.329,21.058 ; v1(69.262,31.113) 69.317,31.058 C8F.2@70.329,31.058 ; v1(69.262,41.113) 69.317,41.058 C8E.2@70.329,41.058 ; v1(69.262,51.113) 69.317,51.058 C8D.2@70.329,51.058 ; v1(69.262,71.113) 69.317,71.058 C8B.2@70.329,71.058 ; v1(69.262,81.113) 69.317,81.058 C8A.2@70.329,81.058 ; v1(69.275,61.069) 69.33,61.014 C8C.2@70.341,61.014 ; v1(71.699,5.974) 71.724,5.948 C10H.1@72.465,5.948 72.775,6.258 IC2H.2@72.775,7.567 ; v1(71.699,15.974) 71.724,15.948 C10G.1@72.465,15.948 72.775,16.258 IC2G.2@72.775,17.567 ; v1(71.699,25.974) 71.724,25.948 C10F.1@72.465,25.948 72.775,26.258 IC2F.2@72.775,27.567 ; v1(71.699,35.974) 71.724,35.948 C10E.1@72.465,35.948 72.775,36.258 IC2E.2@72.775,37.567 ; v1(71.699,45.974) 71.724,45.948 C10D.1@72.465,45.948 72.775,46.258 IC2D.2@72.775,47.567 ; v1(71.699,65.974) 71.724,65.948 C10B.1@72.465,65.948 72.775,66.258 IC2B.2@72.775,67.567 ; v1(71.699,75.974) 71.724,75.948 C10A.1@72.465,75.948 72.775,76.258 IC2A.2@72.775,77.567 ; v1(71.711,55.93) 71.737,55.904 C10C.1@72.478,55.904 72.788,56.214 IC2C.2@72.788,57.523 ; v1(71.887,13.543) 71.894,13.55 C9H.1@72.575,13.55 ; v1(71.887,23.543) 71.894,23.55 C9G.1@72.575,23.55 ; v1(71.887,33.543) 71.894,33.55 C9F.1@72.575,33.55 ; v1(71.887,43.543) 71.894,43.55 C9E.1@72.575,43.55 ; v1(71.887,53.543) 71.894,53.55 C9D.1@72.575,53.55 ; v1(71.887,63.493) 71.894,63.5 C9C.1@72.575,63.5 ; v1(71.887,73.543) 71.894,73.55 C9B.1@72.575,73.55 ; v1(71.887,83.543) 71.894,83.55 C9A.1@72.575,83.55 ; C9H.1@72.565,13.448 72.775,13.238 IC2H.9@72.775,11.967 ; C9G.1@72.565,23.448 72.775,23.238 IC2G.9@72.775,21.967 ; C9F.1@72.565,33.448 72.775,33.238 IC2F.9@72.775,31.967 ; C9E.1@72.565,43.448 72.775,43.238 IC2E.9@72.775,41.967 ; C9D.1@72.565,53.448 72.775,53.238 IC2D.9@72.775,51.967 ; C9B.1@72.565,73.448 72.775,73.238 IC2B.9@72.775,71.967 ; C9A.1@72.565,83.448 72.775,83.238 IC2A.9@72.775,81.967 ; C9C.1@72.578,63.404 72.788,63.194 IC2C.9@72.788,61.923 ; CLIP9.1@74.444,89.88 74.444,88.123 v1(74.494,88.073) ; v1(74.944,2.88) D6.1@76.594,2.88 ; v1(76.714,1.336) 76.594,1.456 D6.1@76.594,2.88 ; v1(77.544,14.28) 77.544,14.055 77.694,13.905 C3H.1@78.569,13.905 ; v1(77.544,24.28) 77.544,24.055 77.694,23.905 C3G.1@78.569,23.905 ; v1(77.544,34.28) 77.544,34.055 77.694,33.905 C3F.1@78.569,33.905 ; v1(77.544,44.28) 77.544,44.055 77.694,43.905 C3E.1@78.569,43.905 ; v1(77.544,54.28) 77.544,54.055 77.694,53.905 C3D.1@78.569,53.905 ; v1(77.544,74.28) 77.544,74.055 77.694,73.905 C3B.1@78.569,73.905 ; v1(77.544,84.28) 77.544,84.055 77.694,83.905 C3A.1@78.569,83.905 ; v1(77.557,64.236) 77.557,64.011 77.707,63.861 C3C.1@78.582,63.861 ; v1(78.169,2.88) D6.1@76.594,2.88 ; CLIP16.1@82.444,-0.12 82.444,1.455 v1(82.469,1.48) ; v1(84.444,84.38) 84.444,83.78 C13A.1@84.794,83.43 ; v1(84.719,14.155) 84.719,13.505 C13H.1@84.794,13.43 ; v1(84.719,24.155) 84.719,23.505 C13G.1@84.794,23.43 ; v1(84.719,34.155) 84.719,33.505 C13F.1@84.794,33.43 ; v1(84.719,44.155) 84.719,43.505 C13E.1@84.794,43.43 ; v1(84.719,54.155) 84.719,53.505 C13D.1@84.794,53.43 ; v1(84.719,74.155) 84.719,73.505 C13B.1@84.794,73.43 ; v1(84.732,64.111) 84.732,63.461 C13C.1@84.807,63.386 ; D5.2@85.344,86.88 v1(86.913,86.88) ; C12H.1@86.944,13.83 86.994,13.88 v1(87.744,13.88) ; C12G.1@86.944,23.83 86.994,23.88 v1(87.744,23.88) ; C12F.1@86.944,33.83 86.994,33.88 v1(87.744,33.88) ; C12E.1@86.944,43.83 86.994,43.88 v1(87.744,43.88) ; C12D.1@86.944,53.83 86.994,53.88 v1(87.744,53.88) ; C12B.1@86.944,73.83 86.994,73.88 v1(87.744,73.88) ; C12A.1@86.944,83.83 86.994,83.88 v1(87.744,83.88) ; C12C.1@86.957,63.786 87.007,63.836 v1(87.757,63.836) ; C14H.1@90.894,6.13 90.969,6.205 90.969,6.33 91.045,6.406 91.353,6.406 ; C14G.1@90.894,16.13 90.994,16.23 90.994,16.38 91.327,16.38 91.353,16.406 ; C14F.1@90.894,26.13 91.262,26.498 91.353,26.406 ; C14D.1@90.894,46.13 91.119,46.355 91.119,46.405 91.12,46.406 91.353,46.406 ; C14B.1@90.894,66.13 91.094,66.33 91.094,66.43 91.329,66.43 91.353,66.406 ; C14A.1@90.894,76.13 91.069,76.305 91.069,76.38 91.095,76.406 91.353,76.406 ; C14C.1@90.907,56.086 91.183,56.362 91.366,56.362 ; v1@91.307,36.867 91.307,36.543 C14E.1@90.894,36.13 90.919,36.13 91.323,36.534 91.323,36.85 v1(91.353,36.88) 91.461,36.988 92.143,36.306 C4E.1@92.353,36.306 ; v1(91.353,6.88) 91.353,6.406 ; v1(91.353,16.88) 91.353,16.406 ; v1(91.353,26.88) 91.353,26.406 ; v1(91.353,46.88) 91.353,46.406 ; v1(91.353,66.88) 91.353,66.406 ; v1(91.353,76.88) 91.353,76.406 ; v1(91.366,56.836) 91.366,56.362 ; C4H.1@92.353,6.306 91.453,6.306 91.353,6.406 ; C7H.2@92.353,13.856 93.393,13.856 v1(93.419,13.83) ; C4G.1@92.353,16.306 91.453,16.306 91.353,16.406 ; C7G.2@92.353,23.856 93.393,23.856 v1(93.394,23.855) ; C4F.1@92.353,26.306 91.453,26.306 91.353,26.406 ; C7F.2@92.353,33.856 93.37,33.856 v1(93.419,33.905) ; C7E.2@92.353,43.856 93.368,43.856 v1(93.394,43.83) ; C4D.1@92.353,46.306 91.453,46.306 91.353,46.406 ; C7D.2@92.353,53.856 93.345,53.856 v1(93.394,53.905) ; C4B.1@92.353,66.306 91.453,66.306 91.353,66.406 ; C7B.2@92.353,73.856 93.32,73.856 v1(93.344,73.88) ; C4A.1@92.353,76.306 91.453,76.306 91.353,76.406 ; C7A.2@92.353,83.856 93.395,83.856 v1(93.419,83.88) ; C4C.1@92.366,56.262 91.466,56.262 91.366,56.362 ; C7C.2@92.366,63.812 93.412,63.812 v1(93.444,63.78) ; v1(94.069,39.78) 94.084,39.795 C97.1@95.069,39.795 95.199,39.665 96.091,39.665 96.146,39.72 97.134,39.72 IC36.3@97.189,39.665 98.364,39.665 IC36.53@99.364,38.665 ; v1(94.419,88.105) 94.444,88.13 CLIP10.1@94.444,89.88 ; v1(96.119,52.355) 96.144,52.33 C106.1@97.194,52.33 ; IC33.8@96.444,16.634 IC33.4@100.394,16.634 IC33.4@100.969,16.634 ; v1(96.644,55.955) 96.694,55.905 C105.1@97.319,55.905 ; C91.1@97.155,29.757 97.155,28.669 v1(97.194,28.63) ; IC36.12@97.189,35.165 98.364,35.165 IC36.53@99.364,36.165 ; IC36.7@97.189,37.665 IC36.53@100.364,37.665 ; v1(98.175,78.525) 98.92,78.525 98.944,78.549 C32.1@98.957,78.536 ; v1(98.933,29.285) C89.1@98.933,30.035 ; RN4.7@99.319,51.62 100.779,51.62 v1(100.819,51.58) ; IC36.18@99.364,33.49 IC36.53@99.364,36.165 ; v1(99.369,44.305) 99.219,44.155 C90.1@99.219,43.33 99.364,43.185 99.364,42.408 99.309,42.353 99.309,41.395 IC36.49@99.364,41.34 IC36.53@99.364,38.665 ; v1(99.394,1.38) 99.444,1.33 CLIP14.1@99.444,-0.12 ; IC33.3@99.464,14.434 99.515,14.484 v1(100.272,14.484) ; IC33.5@99.464,18.834 99.535,18.763 v1(100.173,18.763) ; v1(100.244,20.93) 100.272,20.902 C99.1@101.374,20.902 ; C87.1@100.432,30.035 100.432,29.297 v1(100.444,29.285) ; IC36.46@100.864,41.34 IC36.53@100.864,37.665 ; C98.1@100.915,45.121 v1(100.915,45.921) ; v1(101.632,9.777) 101.714,9.86 C101.1@101.714,10.766 ; v1(101.694,18.881) 102.246,18.881 IC34.8@102.332,18.967 ; v1(101.971,16.23) 101.373,16.23 IC33.4@100.969,16.634 ; v1(101.971,16.909) 101.944,16.882 101.217,16.882 IC33.4@100.969,16.634 ; v1(102.444,28.63) C95.1@102.444,29.48 ; C88.1@102.694,45.18 103.644,45.18 v1(103.694,45.13) ; C103.1@102.744,65.58 103.719,65.58 103.744,65.605 v1(103.769,65.605) ; IC36.26@103.364,33.49 103.285,33.569 103.285,34.194 v1(102.814,34.665) v1(101.714,35.765) v1(100.614,36.865) IC36.53@100.614,37.415 ; v1(103.419,63.755) 103.464,63.71 RN3.4@104.544,63.71 ; IC34.3@103.594,14.505 v1(103.594,15.68) ; IC34.4@104.244,14.505 104.245,14.506 v1(105.149,14.506) ; IC34.5@104.244,18.905 104.306,18.905 104.367,18.967 104.983,18.967 105.069,18.881 v1(105.149,18.881) ; v1(104.244,23.786) 104.269,23.81 C100.1@104.269,22.88 ; C33.1@104.444,5.83 v1(105.344,5.83) ; v1@105.744,26.88 CLIP3.1@107.444,26.88 ; v1(105.794,7.83) 105.844,7.88 CLIP15.1@107.444,7.88 ; v1(105.869,48.555) 106.769,48.555 CLIP12.1@107.444,47.88 ; v1(105.944,41.28) C92.1@105.944,40.43 105.944,39.88 105.729,39.665 105.317,39.665 105.262,39.611 104.866,39.611 104.811,39.665 IC36.38@104.039,39.665 102.864,39.665 IC36.53@100.864,37.665 ; C104.1@106.019,59.255 106.694,59.255 v1(106.719,59.23) ; v1(107.019,36.53) 106.994,36.505 C93.1@106.194,36.505 106.034,36.665 IC36.32@104.039,36.665 101.364,36.665 IC36.53@100.614,37.415 ; C102.1@107.294,20.409 107.369,20.484 v1(107.369,21.33) ; CLIP4.1@107.444,64.88 109.094,64.88 v1(109.144,64.83) ; CLIP11.1@107.444,82.88 v1(109.019,82.88) ; v1(107.713,41.94) 108.662,41.94 C94.1@108.752,42.03 ; v1@108.694,21.63 C63.1@110.144,21.63 ; C71.1@108.86,36.48 108.885,36.505 v1(109.642,36.505) ; v1(109.544,2.13) 110.249,1.425 IC3.1@110.249,-0.52 ; v1(109.944,32.13) C68.1@111.044,32.13 ; v1(110.694,29.63) C84.2@112.144,29.63 ; v1(110.7,42.53) 110.7,41.411 C77.2@110.817,41.294 ; IC29.2@111.244,33.832 111.297,33.885 111.297,34.689 v1(111.35,34.742) ; C15.1@111.819,10.63 112.544,10.63 v1(112.569,10.655) ; v1(111.944,50.38) R52.1@112.894,50.38 ; R63.1@112.644,23.63 112.694,23.68 v1(112.694,24.63) ; v1(112.694,51.63) C39.1@113.494,51.63 ; v1(112.944,42.224) 112.944,41.542 C45.1@113.021,41.465 ; C76.1@113.771,37.222 113.894,37.345 v1(113.894,37.896) ; v1(113.894,22.63) 114.144,22.63 C64.1@114.444,22.33 ; v1(114.244,41.554) 115.271,41.554 C44.2@115.325,41.607 ; v1(114.944,47.63) 114.98,47.594 IC21.3@116.393,47.594 ; v1(115.694,26.13) R75.1@115.694,26.91 116.029,27.245 IC32.3@117.244,27.245 ; IC30.2@115.845,32.679 115.845,31.729 v1(115.944,31.63) ; IC24.6@115.969,18.384 115.978,18.393 116.633,18.393 v1(116.642,18.402) ; C38.2@116.244,44.13 v1(117.694,44.13) ; v1(116.399,37.965) 116.399,37.885 116.52,37.764 116.52,37.748 116.999,37.748 C41.1@117.267,38.016 ; v1(117.664,35.88) R71.1@117.664,36.63 ; R55.1@118.819,44.561 118.839,44.561 119.027,44.373 119.027,44.353 119.207,44.173 119.499,44.173 v1(119.542,44.13) ; C83.1@119.144,31.13 119.396,31.382 v1(119.4,31.382) ; C60.1@119.7,62.4 119.7,61.425 v1(119.975,61.15) ; IC26.1@120.044,21.93 120.144,21.83 C61.1@121.694,21.83 124.794,21.83 v1(124.844,21.88) ; v1(120.194,12.63) 120.244,12.68 C65.1@121.194,12.68 ; v1(120.969,85.305) 120.994,85.28 C48.1@122.194,85.28 ; IC23.2@121.544,41.469 121.819,41.469 122.216,41.072 122.537,41.072 v1(122.594,41.015) ; IC22.2@121.594,37.915 122.476,37.915 v1(122.48,37.911) ; IC21.6@121.793,47.594 123.158,47.594 v1(123.194,47.63) ; IC21.7@121.793,48.864 123.178,48.864 v1(123.194,48.88) ; v1(122.144,86.23) 122.194,86.18 C48.1@122.194,85.28 ; v1(122.494,34.905) 122.519,34.88 C47.2@123.594,34.88 v1(123.594,33.58) ; IC32.6@122.644,27.245 124.159,27.245 C81.1@124.694,27.78 C81.1@124.569,27.905 ; IC32.7@122.644,28.515 123.759,28.515 123.994,28.28 124.194,28.28 C81.1@124.569,27.905 ; C72.1@123.244,-0.37 v1(123.994,-0.37) ; v1(123.294,85.305) 123.269,85.28 C48.1@122.194,85.28 ; v1(124.644,28.705) 124.644,27.98 C81.1@124.569,27.905 ; v1(124.694,38.63) 124.744,38.68 C43.1@124.744,39.38 ; T9.2@125.129,17.217 126.007,17.217 v1(126.019,17.205) ; v1(125.194,47.88) C80.2@126.644,47.88 ; C37.1@125.244,50.13 v1(125.994,50.13) ; v1(126.369,62.63) C58.1@127.294,62.63 ; v1(127.269,63.68) 127.294,63.655 C58.1@127.294,62.63 ; v1(127.294,61.68) C58.1@127.294,62.63 ; v1(129.175,59.6) 129.2,59.575 C79.1@129.2,58.6 ; v1(131.975,5.675) 132.55,6.25 C122.1@132.58,6.25 ; v1(135.2,1) IC18.2@136.2,1 ; IC31.6@135.591,61.02 136.141,61.02 136.641,60.52 v3(136.641,60.02) 136.641,59.445 137.141,58.945 137.216,59.02 IC31.1@137.691,59.02 137.691,58.695 137.241,58.245 C86.1@137.241,57.27 137.066,57.095 137.066,56.82 v1(136.266,56.82) C78.1@135.641,56.82 ; v1(136.35,-1.5) C121.1@137.05,-1.5 ; C66.1@137.391,65.57 137.391,66.37 v1(137.416,66.395) ; v1(138.378,65.34) 138.494,65.455 C74.1@139.409,65.455 139.409,66.309 v1(139.378,66.34) ; C85.1@139.841,59.02 139.841,58.32 v1(139.891,58.27) ; R74.1@139.861,61.52 139.861,62.115 v1(139.891,62.145) ; IC44.2@140.2,7.465 141.479,7.465 ; IC44.4@140.2,10.005 v1(141.479,10.005) ; v1(141.141,58.27) R68.1@141.141,59.22 ; IC28.1@141.142,64.415 141.824,64.415 IC28.11@142.192,64.046 ; C73.1@141.591,65.77 142.125,65.236 142.125,64.35 v3(142.192,64.282) IC28.11@142.192,64.046 ; v3(142.192,62.59) 142.442,62.34 143.168,62.34 IC28.6@143.242,62.415 ; v3(142.192,63.415) IC28.11@142.192,64.046 ; v1(142.65,5.55) 142.65,6.22 C120.1@142.68,6.25 ; v1(144.128,58.068) 144.148,58.088 144.148,60.071 v1(144.128,60.09) ; v1(145.2,1) IC12.2@146.2,1 ; v1(146.35,-1.5) C119.1@147.05,-1.5 ; v1(147.5,57.95) 147.512,57.962 C69.1@147.512,58.594 ; v1(148.046,63.248) 148.506,63.248 C55.1@148.853,62.901 C56.1@148.853,60.742 ; v1(150.196,10.758) 150.2,10.754 IC43.4@150.2,10.005 ; C53.1@154.694,72.78 154.694,75.246 155.694,76.246 R57.1@155.694,77.91 ; v1(159.244,40.818) C25.1@159.923,40.818 ; v1(159.325,43.3) 159.33,43.305 160.017,43.305 160.25,43.538 IC15.2@160.25,44.45 ; v1(159.967,34.533) C27.1@159.967,35.222 160.25,35.505 IC17.2@160.25,36.45 ; v1(160.088,50) C30.1@160.088,50.62 160.25,50.782 IC14.2@160.25,51.95 ; IC14.4@161.25,51.95 v1(161.8,51.95) ; IC17.4@161.25,36.45 161.7,36.45 v1(161.725,36.425) ; IC15.4@161.25,44.45 v1(161.8,44.45) ; v1(164.75,47.7) 164.762,47.688 C22.1@165.418,47.688 165.418,48.093 165.75,48.425 IC5.2@165.75,48.95 ; v1(164.856,55.185) C28.1@165.564,55.185 165.75,55.371 IC13.2@165.75,56.45 ; IC16.2@165.75,40.45 v1(165.75,41.2) ; IC5.4@166.75,48.95 166.75,48.302 v1(167.012,48.04) ; v1(166.75,39.075) IC16.4@166.75,40.45 ; v1(171.5,-1) C123.1@172.15,-1 ; v1(171.5,5.8) C108.1@172.15,5.8 ; D18.2@173.4,14.1 v1(174.2,14.1) ; IC37.3@180.6,7.15 181.84,7.15 v1(181.84,7.8) ; IC37.4@180.6,7.8 v1(181.84,7.8) ; IC37.5@180.6,8.45 181.84,8.45 v1(181.84,7.8) ; IC46.6@180.631,2.742 v1(181.833,2.742) ; IC46.7@180.631,3.392 v1(181.833,3.392) ; IC4.2@184.75,56.45 v1(184.75,57.848) ; v1(185.55,54.175) 185.899,54.524 C23.1@185.899,55.1 185.899,55.7 185.75,55.85 IC4.4@185.75,56.45 ; D12.2@188.525,5.375 v1(188.525,6.135) ; v1(191.225,2.925) 191.225,2.155 D11.2@191.23,2.15 ; D13.2@191.225,9.05 v1(191.225,9.9) ; IC36.53@99.364,36.165 IC36.53@100.614,37.415 ; IC36.53@99.364,38.665 IC36.53@100.364,37.665 ; IC36.53@100.364,37.665 IC36.53@100.614,37.415 ; IC36.53@100.614,37.415 IC36.53@100.864,37.665
  Top w0.254: R35.2@2.1,81.6 R38.2@2.1,83.3 v1(3.45,83.3) ; v1(7.7,0) R47.1@6.8,0 6.8,-1.7 C36.2@6.9,-1.8 v1(7.8,-1.8) ; T7.2@8.55,3.15 v1(8.55,4.13) ; T8.2@12.45,3.15 v1(12.45,4.13) ; T5.2@16.25,3.15 v1(16.25,4.13) ; T6.2@19.85,3.05 v1(19.85,4.03) ; v1(137.23,45.789) C113.1@137.23,46.7 ; IC40.6@139.961,47.65 v1(139.961,48.72) ; IC44.3@140.2,8.735 141.479,8.735 ; IC44.1@140.267,6.245 141.319,6.245 141.479,6.405 141.479,7.465 141.479,8.735 ; IC40.4@140.611,43.25 140.611,42.169 v1(140.63,42.15) ; IC40.5@140.611,47.65 v1(140.611,48.72) ; v1(141.479,10.005) 141.479,8.735 ; C67.2@144.55,48.15 v1(144.55,49.25) ; IC43.1@150.43,6.245 151.482,6.245 151.692,6.455 151.692,7.47 ; IC43.2@150.43,7.515 151.647,7.515 151.692,7.47 ; IC43.3@150.43,8.785 151.692,8.785 ; IC43.4@150.456,10.029 151.692,10.029 151.692,8.785 ; C112.1@161.1,10.55 v1(161.1,11.2) ; v1(163.853,10.65) T11.2@164.65,10.65 ; IC39.1@164.08,6.405 165.145,6.405 v1(165.15,6.4) ; v1(164.65,-0.9) T10.2@165.55,-0.9 ; IC13.4@166.75,56.45 v1(167.875,56.45) ; v1(167.55,10.3) C109.1@168.5,10.3 ; C110.1@170.35,8 170.917,8 v1(170.922,8.005) ; v1(172.15,1.91) C111.1@172.15,2.6 ; IC46.12@174.8,0.75 173.642,0.75 173.407,0.986 173.407,1.4 ; IC46.11@174.8,1.4 173.407,1.4 ; IC46.10@174.8,2.05 173.407,2.05 ; IC46.9@174.8,2.7 173.407,2.7 ; IC46.8@174.8,3.35 v1(173.407,3.35) 173.407,2.7 ; v1(179.425,9.75) IC37.7@180.6,9.75 ; v1(180.5,14.4) C118.2@181.8,14.4 ; IC41.2@187,13 188.225,13 188.475,13.25 C117.1@189.13,13.25 v1(190.079,13.25) ; 151.692,7.47 151.692,8.785 ; 173.407,1.4 173.407,2.05 ; 173.407,2.05 173.407,2.7
  Top w0.381: R117.1@140.3,49.558 v1(141.068,49.558)
  Top w0.508: R50.1@91.95,-1.55 91.95,-1.325 93.155,-0.12 CLIP14.1@99.444,-0.12 ; IC3.8@119.139,-0.52 119.794,-0.52 v1(119.944,-0.37) 120.444,0.13 R62.1@120.444,8.66 121.619,8.66 IC27.4@121.789,8.83 ; v1(144.03,38.175) LD7.1@144.03,38.925 ; v1(154.7,73.7) C53.1@154.7,72.8 v1(155.75,72.8) ; v1(156.425,72.8) C54.1@157.5,72.8 ; v1(156.45,63.2) C52.2@157.5,63.2 ; v1(157.5,61.875) C52.2@157.5,63.2 ; v1(157.5,73.7) C54.1@157.5,72.8 ; v1(158.55,72.8) C54.1@157.5,72.8 ; v1(158.575,63.2) C52.2@157.5,63.2 ; v1(164.95,66.4) C57.1@166,66.4 ; v1(166,65.5) C57.1@166,66.4 ; v1(167.075,66.4) C57.1@166,66.4 ; LD8.1@169.4,63.525 169.425,63.55 v1(169.425,64.3) ; C16.1@184.85,41.2 185,41.35 IC7.2@185,42.7 IC7.2@184.95,42.65 ; C16.1@184.9,41.2 v1(185.55,41.2) ; C18.1@184.95,19.4 185,19.45 IC11.2@185,20.7 ; C20.1@184.95,30.6 185,30.65 IC9.2@185,31.7 ; C21.1@184.95,35.9 v1(185.55,35.9) ; C21.1@184.975,35.925 IC8.2@184.975,37.175 ; C18.1@185,19.4 v1(185.65,19.4) ; IC10.2@185,26.2 185,24.9 v1(185.65,24.9) ; C20.1@185,30.4 v1(185.65,30.4) ; IC6.2@185,48.7 185,47.2 v1(185.65,47.2)
  Top w0.762: v1(114.294,68.6) C51.1@115.819,68.6 ; C50.2@122.744,73.38 v1(123.944,73.38) ; C49.1@122.844,75.63 v1(123.694,75.63) ; v1(125.194,61.88) C59.1@125.194,62.73 ; C55.1@148.853,62.901 v1(149.62,62.901)
  Top w1: v2(163.425,85.95) D16.2@165.3,85.95 167.6,88.25 171.175,88.25 ; v2(165.33,75.666) C114.1@165.33,76.95 ; v2(167.73,75.65) C115.1@167.73,76.95 ; FL1.4@171.175,85.35 171.175,88.25 ; v2(174.775,76.005) FL1.4@174.775,78.05 ; FL1.4@177.025,88.25 171.175,88.25
  other v1: 120.444,4.395 120.444,5.147 120.444,5.985 61.891,12.512 64.162,12.548 108.694,21.63 61.891,22.512 64.162,22.548 105.744,26.88 61.891,32.512 64.162,32.548 98.414,34.665 99.514,34.665 100.614,34.665 101.714,34.665 98.414,35.765 99.514,35.765 100.614,35.765 102.814,35.765 98.414,36.865 99.514,36.865 101.714,36.865 102.814,36.865 98.414,37.965 99.514,37.965 100.614,37.965 101.714,37.965 102.814,37.965 98.414,39.065 99.514,39.065 100.614,39.065 101.714,39.065 102.814,39.065 98.414,40.165 99.514,40.165 100.614,40.165 101.714,40.165 102.814,40.165 61.891,42.512 64.162,42.548 61.891,52.512 64.162,52.548 61.903,62.468 64.175,62.504 114.894,68.6 61.891,72.512 64.162,72.548 112.419,80.955 61.891,82.512 64.162,82.548 111.707,89.336
  other v3: 136.641,59.095 136.641,60.87